# Altium PCB controle_motor_official.PcbDoc
Units mm, origin at the board's own origin, x right, y up, seen from the top; angles counter-clockwise.
Board outline 65.02 x 100.08 mm, 2 copper layers (Top Layer, Bottom Layer); 45 components, 40 nets, 148 pads, 16 vias.
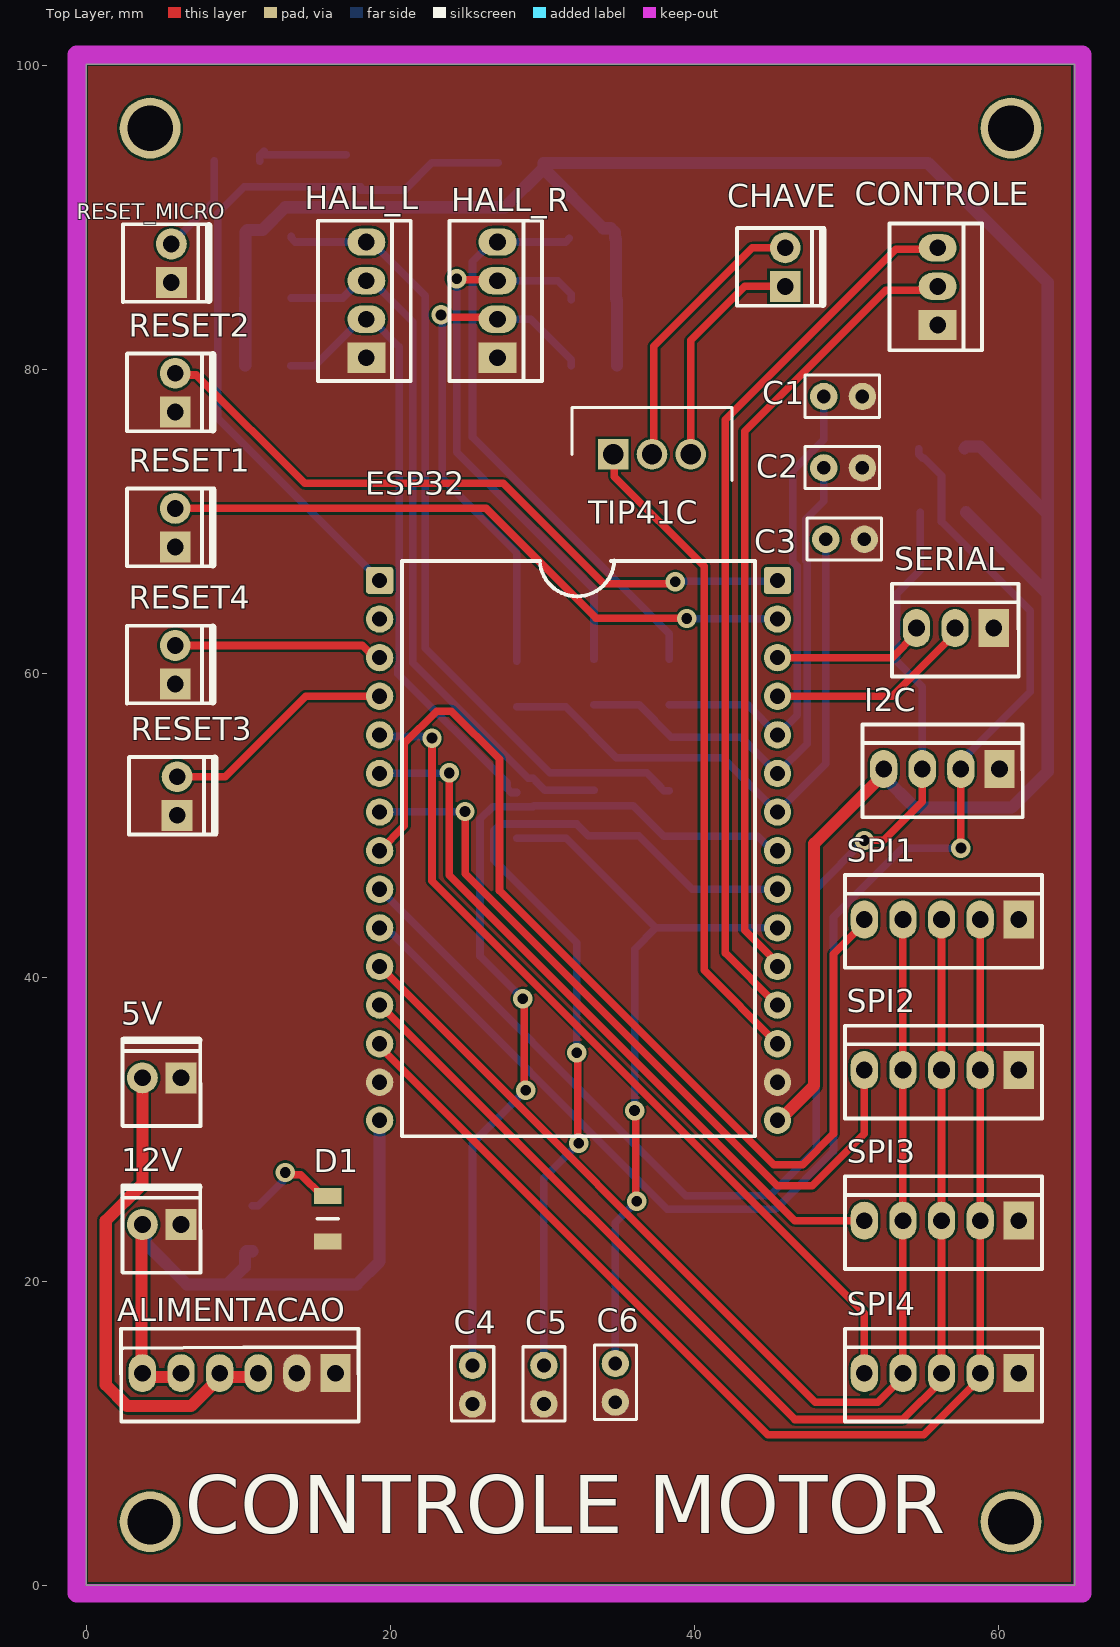
[diagram p0: Top Layer view]
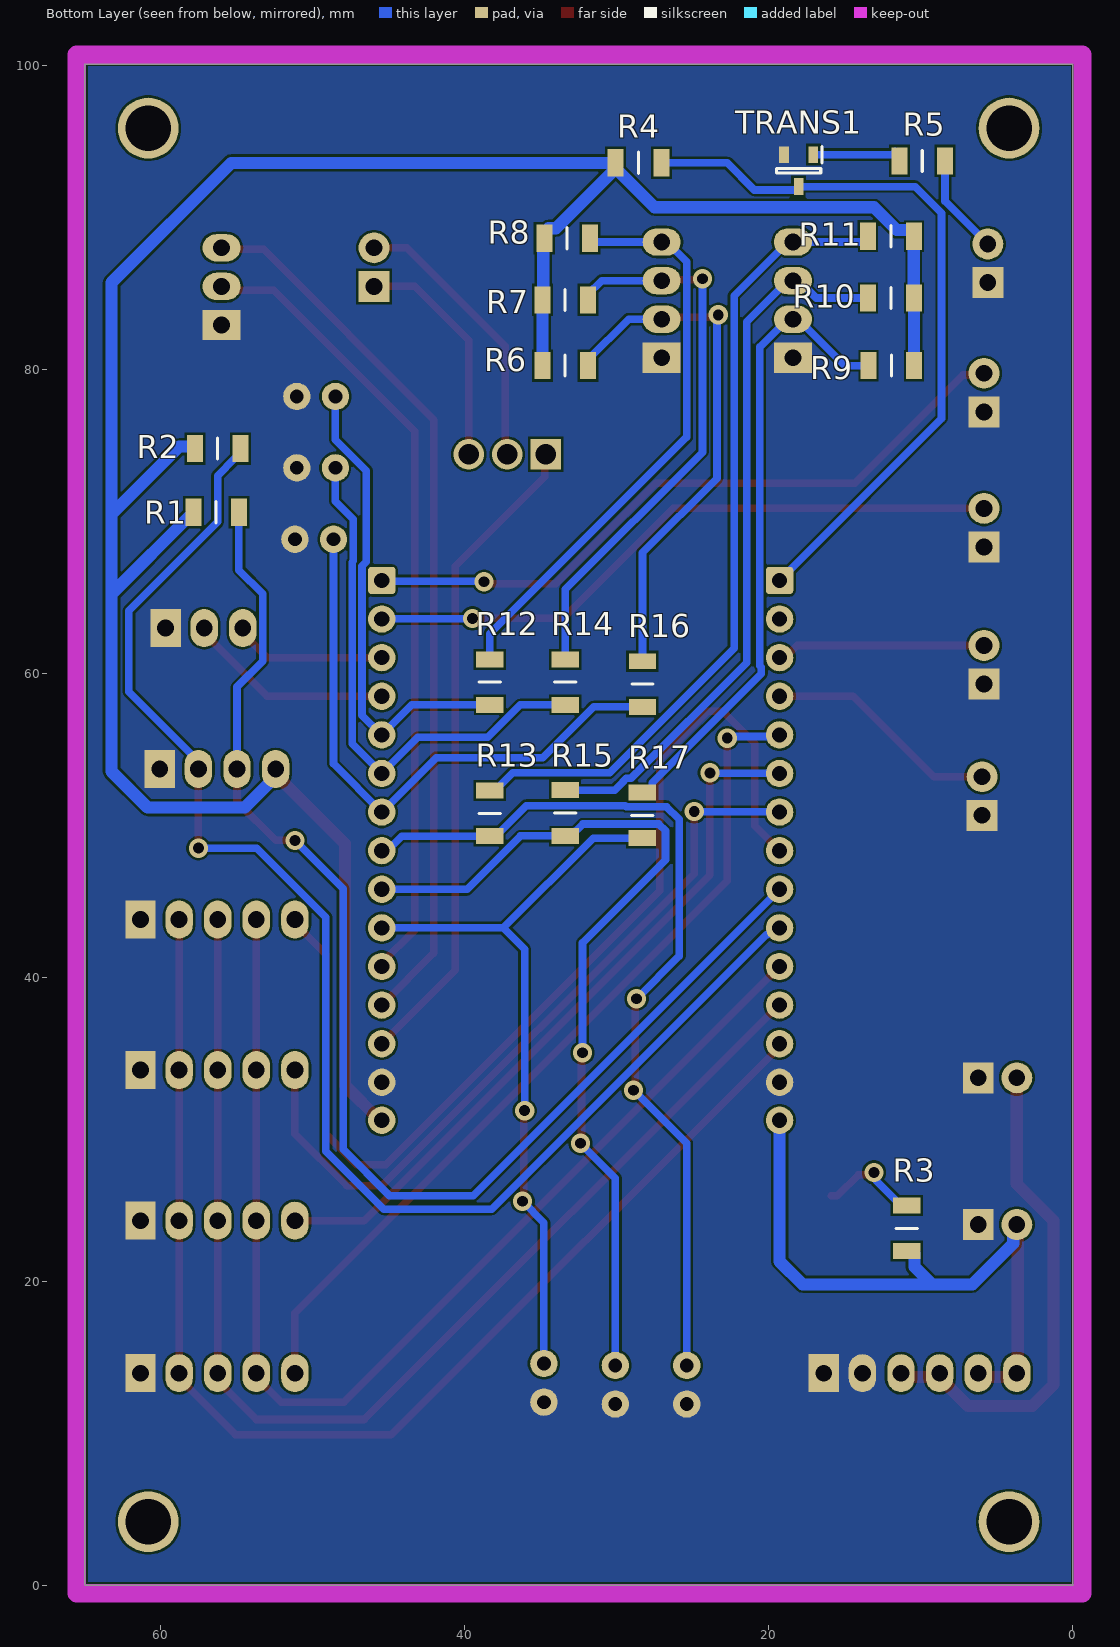
[diagram p1: Bottom Layer view, seen from below]

## Layer stack, top to bottom
Top Solder: solder mask 0.0102, Solder Resist, Dk 3.5
Top Layer: signal copper 0.0356
Dielectric 1: dielectric 0.32, FR-4, Dk 4.8
Bottom Layer: signal copper 0.0356
Bottom Solder: solder mask 0.0102, Solder Resist, Dk 3.5

## Board outline
0,0 65.024,0 65.024,100.076 0,100.076

## Design rules (kind name [scope] priority, off if disabled: settings)
Clearance [All] p1: gap=0.152 ignorepadtopadclearanceinfootprint=FALSE except(0: Arc-Hole Track-Hole SMDPad-Hole THPad-Hole Via-Hole Fill-Hole Poly-Hole Region-Hole Text-Hole)
ComponentClearance [All] p1: gap=0.1 collisioncheckmode=3 verticalgap=0.1 showdistances=FALSE
HoleSize [All] p1: absolutevalues=TRUE maxlimit=3 minlimit=0.025 maxpercent=80.000 minpercent=20.000
MinimumSolderMaskSliver [All] p1: minsoldermaskwidth=0.1
PolygonConnect [All] p1: connectstyle=Direct reliefconductorwidth=0.254 reliefentries=4 polygonreliefangle="90 Angle" airgapwidth=0.254
RoutingVias [All] p1: holewidth=0.4 width=0.8 viastyle="Through Hole" minholewidth=0.3 minwidth=0.6 maxholewidth=0.5 maxwidth=1
SilkToSilkClearance [All] p1: silktosilkclearance=0
SilkToSolderMaskClearance [IsPad] p1: minsilkscreentomaskgap=0 clearancetoexposedcopper=TRUE
SolderMaskExpansion [All] p1: expansion=0.08 istentingtop=FALSE
Width [All] p1: maxlimit=1 minlimit=0.3 preferedwidth=0.5
25 further rules are at their usual default settings.

## Classes and differential pairs
component class U_controle_motor_comunicacao: I2C R1 R2 SERIAL SPI1 SPI2 SPI3 SPI4
component class U_controle_motor_chave: C1 C2 C3 C4 C5 C6 CHAVE CONTROLE HALL_L HALL_R R6 R7 R8 R9 R10 R11 R12 R13 R14 R15 R16 R17 TIP41C
component class U_controle_motor_alimentacao: 5V 12V ALIMENTACAO D1 R3 R4 R5 RESET_MICRO TRANS1
component class controle_motor_official: ESP32 RESET1 RESET2 RESET3 RESET4

## Components (designator, comment, footprint, x,y, rotation, side; value= is the part's Value field where it differs from the comment)
5V "KK_2.54_2vias" KK_2VIAS_180º 6.223,33.401 r180 top
12V "KK_2.54_2vias" KK_2VIAS_180º 6.223,23.749 r180 top
ALIMENTACAO "KK_2.54_6vias" KK_6vias_180° 16.383,13.97 r180 top
C1 "0.1uF" "CAP CER DISK 0.1uF" 49.784,78.232 r180 top
C2 "0.1uF" "CAP CER DISK 0.1uF" 49.784,73.533 r180 top
C3 "0.1uF" "CAP CER DISK 0.1uF" 49.911,68.834 r180 top
C4 "0.1uF" "CAP CER DISK 0.1uF" 25.4,13.208 r90 top
C5 "0.1uF" "CAP CER DISK 0.1uF" 30.099,13.208 r90 top
C6 "0.1uF" "CAP CER DISK 0.1uF" 34.798,13.335 r90 top
CHAVE "KK_2.54_2vias" KK_2VIAS_180º 45.974,85.471 r90 top
CONTROLE "KK_2.54_3vias" KK_3vias_180º 56.007,82.931 r90 top
D1 "LED 3MM RED" "LED RED" 15.875,24.13 r270 top
ESP32 "microcontrolador" ESP32_Desvikit_v1 19.291,66.127 r0 top value="ESP32 Desvikit V1"
HALL_L "KK_2.54_4vias" KK_4vias_180° 18.415,80.772 r90 top
HALL_R "KK_2.54_4vias" KK_4vias_180° 27.051,80.772 r90 top
I2C "KK_2.54_4vias" KK_4vias_180° 60.071,53.721 r180 top
R1 "4k7" RESC3216X60N 56.364,70.612 r0 bottom
R2 "4k7" RESC3216X60N 56.261,74.803 r0 bottom
R3 "680R" RESC3216X60N 10.922,23.495 r90 bottom
R4 "2k2" RESC3216X60N 28.575,93.599 r0 bottom
R5 "2k2" RESC3216X60N 9.906,93.726 r180 bottom
R6 "2k2" RESC3216X60N 33.401,80.264 r0 bottom
R7 "2k2" RESC3216X60N 33.401,84.582 r0 bottom
R8 "2k2" RESC3216X60N 33.274,88.646 r0 bottom
R9 "2k2" RESC3216X60N 11.938,80.264 r180 bottom
R10 "2k2" RESC3216X60N 11.962,84.709 r180 bottom
R11 "2k2" RESC3216X60N 11.962,88.773 r180 bottom
R12 "4k7" RESC3216X60N 38.354,59.436 r270 bottom
R13 "4k7" RESC3216X60N 38.354,50.8 r270 bottom
R14 "4k7" RESC3216X60N 33.394,59.436 r270 bottom
R15 "4k7" RESC3216X60N 33.401,50.824 r270 bottom
R16 "4k7" RESC3216X60N 28.314,59.309 r270 bottom
R17 "4k7" RESC3216X60N 28.321,50.673 r270 bottom
RESET1 "KK_2.54_2vias" KK_2VIAS_180º 5.842,68.326 r90 top
RESET2 "KK_2.54_2vias" KK_2VIAS_180º 5.842,77.216 r90 top
RESET3 "KK_2.54_2vias" KK_2VIAS_180º 5.969,50.673 r90 top
RESET4 "KK_2.54_2vias" KK_2VIAS_180º 5.842,59.309 r90 top
RESET_MICRO "KK_2.54_2vias" KK_2VIAS_180º 5.588,85.725 r90 top
SERIAL "KK_2.54_3vias" KK_3vias_180º 59.69,62.992 r180 top
SPI1 "KK_2.54_5vias" KK_5vias_180° 61.341,43.815 r180 top
SPI2 "KK_2.54_5vias" KK_5vias_180° 61.341,33.909 r180 top
SPI3 "KK_2.54_5vias" KK_5vias_180° 61.341,24.003 r180 top
SPI4 "KK_2.54_5vias" KK_5vias_180° 61.341,13.97 r180 top
TIP41C "TIP41CG" TO254P483X1010X2035-3P 34.671,74.422 r0 top
TRANS1 "Trans BC817" SOT96P240X110-3N 18.034,93.091 r270 bottom

## Footprints (in the part's own frame and the unit in brackets; to place one, negate y for a bottom-side part, rotate by r counter-clockwise, add the part's x,y. Pads: shape width x height; smd on the part's side, far side on the other; paste and mask are expansions set on the pad)
"CAP CER DISK 0.1uF" [mm] "Connector; Header; 5 Position"
  round 1.8 hole 0.9: 1(-1.27,0) 2(1.27,0)
  silkscreen extent -2.4,-1.4 2.5,1.37, body extent -2.28,-1.25 2.42,1.25, height 6.1
ESP32_Desvikit_v1 [mm]
  rrect25% 1.8x1.8 hole 1: 1(0,0) 30(26.175,0)
  round 1.8 hole 1: 2(0,-2.54) 3(0,-5.08) 4(0,-7.62) 5(0,-10.16) 6(0,-12.7) 7(0,-15.24) 8(0,-17.78) 9(0,-20.32) 10(0,-22.86) 11(0,-25.4) 12(0,-27.94) 13(0,-30.48) 14(0,-33.02) 15(0,-35.52) 16(26.175,-35.52) 17(26.175,-33.02) 18(26.175,-30.48) 19(26.175,-27.94) 20(26.175,-25.4) 21(26.175,-22.86) 22(26.175,-20.32) 23(26.175,-17.78) 24(26.175,-15.24) 25(26.175,-12.7) 26(26.175,-10.16) 27(26.175,-7.62) 28(26.175,-5.08) 29(26.175,-2.54)
  silkscreen extent 1.47,-36.57 24.69,1.31, body extent -1.2,-46.03 27.4,4.9, height 15.1
KK_2VIAS_180º [mil]
  rect 80x80 hole 43.31: 1(0,0)
  round 80 hole 43.31: 2(100,0)
  silkscreen extent -50,-101 151,125, body extent -61,-108 165,128, height 464
KK_3vias_180º [mm]
  rect 2x2.5 hole 1.1: 1(0,0)
  oval 1.8x2.5 hole 1.1: 2(2.54,0) 3(5.08,0)
  silkscreen extent -1.65,-2.92 6.69,3.18, body extent -1.6,-2.95 6.69,3.05, height 11.9
KK_4vias_180° [mm]
  rect 2x2.5 hole 1.1: 1(0,0)
  oval 1.8x2.5 hole 1.1: 2(2.54,0) 3(5.08,0) 4(7.62,0)
  silkscreen extent -1.53,-2.92 9.02,3.18, body extent -1.4,-2.79 8.76,3.01, height 11.72
KK_5vias_180° [mm]
  rect 2x2.5 hole 1.1: 1(0,0)
  oval 1.8x2.5 hole 1.1: 2(2.54,0) 3(5.08,0) 4(7.62,0) 5(10.16,0)
  silkscreen extent -1.53,-2.92 11.43,3.18, body extent -1.4,-2.79 11.3,3.01, height 11.72
KK_6vias_180° [mm]
  rect 2x2.5 hole 1.1: 1(0,0)
  oval 1.8x2.5 hole 1.1: 2(2.54,0) 3(5.08,0) 4(7.62,0) 5(10.16,0) 6(12.7,0)
  silkscreen extent -1.53,-2.92 14.11,3.18, body extent -1.4,-2.79 13.84,3.05, height 11.7
"LED RED" [mm]
  rect 1.05x1.8 smd: 1(-1.5,0) 2(1.5,0)
  silkscreen extent 0,-0.7 0,0.7, body extent -0.79,-0.43 0.81,0.37, height 0.75
RESC3216X60N [mm]
  rect 1.05x1.8 smd: 1(-1.5,0) 2(1.5,0)
  silkscreen extent 0,-0.7 0,0.7, body extent -1.57,-0.8 1.58,0.8, height 0.6
SOT96P240X110-3N [mm]
  rect 1.1x0.65 smd: 1(-1.05,0.96) 2(-1.05,-0.96) 3(1.05,0)
  silkscreen extent -1.6,-1.45 0.15,1.54, body extent -1.2,-1.45 1.2,1.45, height 1.1
TO254P483X1010X2035-3P [mm]
  rect 2.01x2.01 hole 1.34: 1(0,0)
  round 2.01 hole 1.34: 2(2.54,0) 3(5.08,0)
  silkscreen extent -2.73,-1.74 7.81,3.1, body extent -2.51,-1.74 7.59,3.1, height 18.56

## Part data
5V 12V CHAVE RESET1 RESET2 RESET3 RESET4 RESET_MICRO: "Conector KK 2.54mm 2 vias", Descrição="Conector KK 3 vias com passo 2.54mm", Encapsulamento="PTH - 180º", Modelo="2 vias - 180º", Valor="KK 2 vias 180º"
ALIMENTACAO: "Conector KK 2.54mm 6 vias", Descrição="Conector KK 3 vias com passo 2.54mm", Encapsulamento="PTH - 180º", Modelo="3 vias - 180º", Valor="KK 6 vias 180º"
C1 C2 C3 C4 C5 C6: library part "CAP CER DISK 0.1uF", "CAP CER DISK 0.1uF", Capacitance Tolerance="+80%, -20%", Capacitor Terminals="Radial Leaded", Dielectric Characteristic=Y5, Manufacturer=-, Manufacturer Part Number=IMP14925, Operating Temperature Max=85, Operating Temperature Min=-25, Operating Temperature Range="-25°C to +85°C<!--FANDB--><div class=\"features-and-benefits-container\"><div class=\"features-and-benefits-description\"><span class=\"features-benefits-value\">The MCFY series from Multicomp are radial leaded ceramic disc capacitors. The capacitance values ranges from 6800pF to 0.22?F.</span></div><div class=\"features-and-benefits-list\"><ul class=\"features-and-benefits-list-list\"><li class=\"features-and-benefits-list-item\">Large capacitance in small size</li><li class=\"features-and-benefits-list-item\">Rated voltage of 50V</li><li class=\"features-and-benefits-list-item\">80%/-20% tolerance</li><li class=\"features-and-benefits-list-item\">Operating temperature range -25°C to +85", Supplier Part Number 1="Capacitor Cerâmico Disco 100Kpf/50V (104/100K/100nF/0.1uF) cód. 1351", Voltage Rating=50, Capacitance=0.1uF, Capacitance Tolerance ±="+80%, -20%", ComponentLink1Description=http://loja.multcomercial.com.br/capacitor-ceramico-disco-100kpf-50v-104-100k-100nf-0-1uf-cod-1351.html, ComponentLink1URL=http://loja.multcomercial.com.br/capacitor-ceramico-disco-100kpf-50v-104-100k-100nf-0-1uf-cod-1351.html, Lead Spacing=5, Packaging=Each, Pricing 1="1=0.10 (BRL)", Product Range="MCFY Series", RoHS=YES, Stock 1=115809, Supplier 1="Mult Comercial", SVHC="No SVHC (15-Jun-2015)"
CONTROLE SERIAL: "Conector KK 2.54mm 3 vias", Descrição="Conector KK 3 vias com passo 2.54mm", Encapsulamento="PTH - 180º", Modelo="3 vias - 180º", Valor="KK 3 vias 180º"
D1: Current If Luminous Intensity=2, Forward Current If=20, Forward Voltage VF Max=2.5, LED Colour=Red, Manufacturer=Paralight, Manufacturer Part Number=IMP585, Operating Temperature Max=85, Operating Temperature Min=-40, Operating Temperature Range="-40°C to +85", Peak Forward Current=7, Supplier Part Number 1="Led 3mm Vermelho Difuso L-314HD - Paralight", Voltage Vf Typ="2.2V<!--FANDB--><div class=\"features-and-benefits-container\"><div class=\"features-and-benefits-description\"><span class=\"features-benefits-value\">The L-934LID from Kingbright is a through hole round shape high efficiency red colour LED. The device is made of gallium arsenide phosphide on gallium phosphide orange light emitting diode. This LED is widely used because of low power consumption, long life and solid state reliability.</span></div><div class=\"features-and-benefits-list\"><ul class=\"features-and-benefits-list-list\"><li class=\"features-and-benefits-list-item\">Standard bulb size of T-1 (3mm)</li><li class=\"features-and-benefits-list-item\">Reliable and rugged</li><li class=\"features-and-benefits-list-item\">Viewing angle is 60°</li><li class=\"features-and-benefits-list-item\">Luminous intensity of 3mcd at 2mA</li><li class=\"features-and-benefits-list-item\">Forward voltage is 2.0V</li><li class=\"features-and-benefits-list-item\">Forward current (If) is 20mA</li><li class=\"features-and-benefits-list-item\">Dominant wavelength is 625nm at IF=20mA</li><li class=\"features-and-benefits-list-item\">Peak wavelength is 627nm at IF=20", Bulb Size=3mm, ComponentLink1Description=http://loja.multcomercial.com.br/led-3mm-vermelho-difuso-l-314hd-paralight.html, ComponentLink1URL=http://loja.multcomercial.com.br/led-3mm-vermelho-difuso-l-314hd-paralight.html, Dominant Wavelength=625, External Diameter=2.9, External Length / Height=4.6, Forward Current If Max=20, Forward Voltage=2, Lead Cross-section Depth=0.5, Lead Cross-section Width=0.5, Lead Spacing=2.54, LED / Lamp Size="3mm / T-1", LED Mounting="Through Hole", LED Type=Standard, Lens Shape=Round, Luminous Intensity=3, Luminous Intensity @ If Min=0.7, Luminous Intensity Typ=3, Mounting Type="PCB Through Hole", MSL=-, No. of Pins=2, Packaging=Each, Peak Wavelength=625, PIV Max=5, Pricing 1="1=0.15 (BRL)", RoHS=YES, Stock 1=35260, Supplier 1="Mult Comercial", SVHC="No SVHC (15-Jun-2015)", Viewing Angle=60°, Wavelength Typ=625
ESP32: library part "ESP32 Desvikit v1", "microcontrolador com moculo bluethoth e wifi"
HALL_L HALL_R I2C: "Conector KK 2.54mm 4 vias", Descrição="Conector KK 3 vias com passo 2.54mm", Encapsulamento="PTH - 180º", Modelo="3 vias - 180º", Valor="KK 4 vias 180º"
R1 R2 R12 R13 R14 R15 R16 R17: library part "RES 1206", "RES 1206 5%", Arrow Part Number=CRCW12064K70FKEA, Manufacturer_Name=Vishay, Mouser Part Number=71-CRCW1206-4.7K-E3, Arrow Price/Stock=https://www.arrow.com/en/products/crcw12064k70fkea/vishay, Datasheet Link=http://docs-emea.rs-online.com/webdocs/13ec/0900766b813ecc08.pdf, Height=0.6mm, Manufacturer_Part_Number=CRCW12064K70FKEA, Mouser Price/Stock=https://www.mouser.co.uk/ProductDetail/Vishay-Dale/CRCW12064K70FKEA?qs=1vm4qhDHCvlKJmatsKzyFQ%3D%3D
R3 R4 R5 R6 R7 R8 R9 R10 R11: library part "Resistor 1206", "Resistor", Arrow Part Number=CRCW12064K70FKEA, Manufacturer_Name=Vishay, Mouser Part Number=71-CRCW1206-4.7K-E3, Arrow Price/Stock=https://www.arrow.com/en/products/crcw12064k70fkea/vishay, Datasheet Link=http://docs-emea.rs-online.com/webdocs/13ec/0900766b813ecc08.pdf, Height=0.6mm, Manufacturer_Part_Number=CRCW12064K70FKEA, Mouser Price/Stock=https://www.mouser.co.uk/ProductDetail/Vishay-Dale/CRCW12064K70FKEA?qs=1vm4qhDHCvlKJmatsKzyFQ%3D%3D
SPI1 SPI2 SPI3 SPI4: "Conector KK 2.54mm 5 vias", Descrição="Conector KK 3 vias com passo 2.54mm", Encapsulamento="PTH - 180º", Modelo="3 vias - 180º", Valor="KK 5 vias 180º"
TIP41C: "Transistor", Manufacturer_Name="ON Semiconductor", Mouser Part Number=863-TIP41CG, Arrow Part Number=TIP41CG, Arrow Price/Stock=https://www.arrow.com/en/products/tip41cg/on-semiconductor, Datasheet Link=http://www.onsemi.com/pub/Collateral/TIP41A-D.PDF, Height=4.83mm, Manufacturer_Part_Number=TIP41CG, Mouser Price/Stock=https://www.mouser.co.uk/ProductDetail/onsemi/TIP41CG?qs=xZq1yRCsb1dnnb4X32QAFQ%3D%3D
TRANS1: "Transistor BJT NPN BC817-25-7-F", Arrow Part Number=BC817-25-7-F, Manufacturer_Name="Diodes Inc.", Mouser Part Number=621-BC817-25-7-F, Arrow Price/Stock=https://www.arrow.com/en/products/bc817-25-7-f/diodes-incorporated, Datasheet Link=https://www.diodes.com/assets/Datasheets/ds11107.pdf, Height=1.1mm, Manufacturer_Part_Number=BC817-25-7-F, Mouser Price/Stock=https://www.mouser.co.uk/ProductDetail/Diodes-Incorporated/BC817-25-7-F?qs=rGAXPo9uwV0jK0EyLZnqOw%3D%3D

## Free pads (board coordinates)
  round 4 hole 3: 1(4.191,4.191) 2(60.833,4.191) 3(60.833,95.885) 4(4.191,95.885)

## Via types
v1: diameter 1.27, hole 0.711, Top Layer to Bottom Layer, 16 vias

## Nets (pads, with @x,y where several pads share a name; then routed paths per layer and width w, separated by ;. In a path a pad name is that pad's centre, name@x,y a point inside that pad or via, vN(x,y) a via of type N, cw(c..) or ccw(c..) an arc to the next point about the centre after c; other vN are vias at no path point)
+3V3: ESP32.16 I2C.4 R1.2 R2.2 R4.2 R6.2 R7.2 R8.2 R9.2 R10.2 R11.2 | length 168.6
  Top Layer w0.8: ESP32.16 45.593,30.607 47.879,32.893 47.879,48.799 52.451,53.371 I2C.4
  Bottom Layer w0.8: R9.2 10.45,80.276 10.45,84.697 R10.2 10.462,89.052 10.587,89.177 11.58,89.177 13.081,90.678 27.529,90.678 R4.2@30.075,93.224 ; R6.2 R7.2 34.837,84.645 34.837,88.582 R8.2 34.774,89.021 34.499,89.296 34.003,89.296 R4.2@30.075,93.224 ; I2C.4 52.451,53.213 54.483,51.181 60.872,51.181 63.246,53.555 63.246,65.23 ; R2.2 57.761,74.805 57.886,74.93 58.801,74.93 63.246,70.485 ; R1.2 63.246,65.23 ; R4.2@30.075,93.224 R4.2 55.372,93.599 63.246,85.725 63.246,70.485 ; 63.246,65.23 63.246,70.485
+5V: 5V.2 ALIMENTACAO.3 ALIMENTACAO.4 | length 32.9
  Top Layer w0.8: 5V.2 3.683,26.416 1.27,24.003 1.27,13.208 2.667,11.811 6.888,11.811 8.403,13.326 ALIMENTACAO.4@8.403,14.203 ; ALIMENTACAO.4@9.017,13.716 ALIMENTACAO.3@11.557,13.716
+12V: 12V.2 ALIMENTACAO.5 ALIMENTACAO.6 ESP32.15 R3.1 | length 43.2
  Top Layer w0.8: ALIMENTACAO.6@3.619,14.034 3.619,23.685 12V.2 ; ALIMENTACAO.6@4,13.779 3.937,13.716 ALIMENTACAO.5@6.477,13.716
  Bottom Layer w0.8: 12V.2 3.919,23.513 3.919,22.497 6.604,19.812 9.271,19.812 ; R3.1 10.547,21.995 10.422,21.87 10.422,20.963 9.271,19.812 ; ESP32.15 19.291,21.323 17.78,19.812 9.271,19.812
acelerador: CONTROLE.3 ESP32.19 | length 58.6
  Top Layer w0.5: ESP32.19 42.037,41.616 42.037,76.708 53.245,87.916 55.912,87.916 CONTROLE.3
chave: ESP32.18 TIP41C.1 | length 43.2
  Top Layer w0.5: TIP41C.1 34.736,74.357 34.736,72.96 40.64,67.056 40.64,40.473 ESP32.18
CLK_IN: ESP32.11 SPI1.4 SPI2.4 SPI3.4 SPI4.4 | length 77.1
  Top Layer w0.5: ESP32.11 47.953,12.065 52.07,12.065 53.721,13.716 SPI3.4 SPI2.4 SPI1.4
EN: ESP32.1 R4.1 TRANS1.3 | length 48.5
  Bottom Layer w0.5: TRANS1.3@18.034,91.816 20.95,91.816 22.733,93.599 R4.1 ; TRANS1.3 10.38,92.041 8.636,90.297 8.636,76.782 ESP32.1
GND: 5V.1 12V.1 ALIMENTACAO.1 ALIMENTACAO.2 C1.1 C2.1 C3.1 C4.1 C5.1 C6.1 CONTROLE.1 D1.2 ESP32.14 ESP32.17 HALL_L.1 HALL_R.1 I2C.1 RESET1.1 RESET2.1 RESET3.1 RESET4.1 RESET_MICRO.1 SERIAL.1 SPI1.1 SPI2.1 SPI3.1 SPI4.1 TRANS1.2
ha_l: C6.2 ESP32.21 R17.2 | length 49.5
  Top Layer w0.5: v1(36.068,31.242) 36.136,31.174 36.136,25.349 v1(36.203,25.281)
  Bottom Layer w0.5: R17.2 31.558,49.173 37.464,43.267 ; C6.2 34.798,23.876 v1(36.203,25.281) ; v1(36.068,31.242) 36.068,41.871 37.464,43.267 ; ESP32.21 37.464,43.267
ha_r: C3.2 ESP32.24 R16.2 | length 39.3
  Bottom Layer w0.5: R16.2 31.527,57.809 34.864,54.472 41.881,54.472 ESP32.24 48.641,54.062 C3.2
hb_l: C5.2 ESP32.22 R15.2 | length 59.1
  Top Layer w0.5: v1(32.258,35.052) 32.326,34.984 32.326,29.159 v1(32.393,29.091)
  Bottom Layer w0.5: C5.2 30.099,26.797 v1(32.393,29.091) ; v1(32.258,35.052) 32.258,42.284 26.797,47.745 26.797,49.657 27.24,50.1 32.25,50.1 33.026,49.324 R15.2 36.336,49.324 39.853,45.807 ESP32.22
hb_r: C2.2 ESP32.25 R14.2 | length 35.4
  Bottom Layer w0.5: R14.2 36.36,57.936 38.491,55.806 43.087,55.806 ESP32.25 47.42,55.381 47.42,67.332 47.339,67.413 47.339,70.15 48.514,71.325 C2.2
hc_l: C4.2 ESP32.23 R13.2 | length 59.8
  Top Layer w0.5: v1(28.702,38.608) 28.801,38.509 28.801,32.683 v1(28.901,32.584)
  Bottom Layer w0.5: C4.2 25.4,29.083 v1(28.901,32.584) ; v1(28.702,38.608) 25.891,41.419 25.891,50.402 26.735,51.246 29.388,51.246 29.45,51.308 35.971,51.308 37.979,49.3 R13.2 44.161,49.3 45.114,48.347 ESP32.23
hc_r: C1.2 ESP32.26 R12.2 | length 31.7
  Bottom Layer w0.5: R12.2 43.497,57.936 ESP32.26 46.768,57.269 46.768,67.062 46.482,67.348 46.482,73.342 48.514,75.374 C1.2
MISO_IN: ESP32.12 SPI1.3 SPI2.3 SPI3.3 SPI4.3 | length 79.7
  Top Layer w0.5: ESP32.12 19.344,38.187 46.609,10.922 53.721,10.922 56.261,13.462 SPI3.3 SPI2.3 SPI1.3
MOSI_IN: ESP32.13 SPI1.2 SPI2.2 SPI3.2 SPI4.2 | length 82
  Top Layer w0.5: ESP32.13 19.291,35.446 44.831,9.906 55.087,9.906 58.801,13.62 SPI4.2 SPI3.2 SPI2.2 SPI1.2
NetCHAVE_1: CHAVE.1 TIP41C.3 | length 15.2
  Top Layer w0.5: TIP41C.3 39.751,81.915 43.307,85.471 CHAVE.1
NetCHAVE_2: CHAVE.2 TIP41C.2 | length 18.5
  Top Layer w0.5: TIP41C.2 37.338,74.549 37.338,81.534 43.815,88.011 CHAVE.2
NetD1_1: D1.1 R3.2 | length 6.7
  Top Layer w0.5: v1(13.081,27.178) 13.228,27.031 14.099,27.031 15.5,25.63 D1.1
  Bottom Layer w0.5: R3.2 11.297,24.995 12.934,26.632 12.934,27.031 v1(13.081,27.178)
NetHALL_L_2: HALL_L.2 R9.1 R17.1 | length 42
  Bottom Layer w0.5: R9.1 15.017,80.264 18.065,83.312 18.765,83.312 20.593,81.484 20.593,60.508 20.497,60.411 20.497,59.997 27.671,52.823 27.671,52.448 27.946,52.173 R17.1
NetHALL_L_3: HALL_L.3 R10.1 R15.1 | length 47.5
  Bottom Layer w0.5: R10.1 16.875,84.709 18.018,85.852 18.765,85.852 21.463,83.154 21.463,60.706 29.069,53.1 29.388,53.1 29.623,52.865 29.623,52.851 30.15,52.324 R15.1
NetHALL_L_4: HALL_L.4 R11.1 R13.1 | length 53.7
  Bottom Layer w0.5: R11.1 13.462,88.667 13.737,88.392 HALL_L.4 18.765,88.392 22.288,84.869 22.288,61.659 30.48,53.467 36.85,53.467 37.704,52.613 37.704,52.575 37.979,52.3 R13.1
NetHALL_R_2: HALL_R.2 R6.1 R16.1 | length 35
  Top Layer w0.5: v1(23.325,83.599) 23.468,83.455 26.908,83.455 HALL_R.2
  Bottom Layer w0.5: v1(23.325,83.599) 23.407,83.517 23.407,72.859 28.314,67.952 R16.1 ; HALL_R.2 29.228,83.312 31.901,80.639 R6.1
NetHALL_R_3: HALL_R.3 R7.1 R14.1 | length 37.1
  Top Layer w0.5: v1(24.362,85.979) 24.425,85.915 26.987,85.915 HALL_R.3
  Bottom Layer w0.5: v1(24.362,85.979) 24.362,74.571 33.394,65.539 R14.1 ; HALL_R.3 31.006,85.852 31.901,84.957 R7.1
NetHALL_R_4: HALL_R.4 R8.1 R12.1 | length 38.5
  Bottom Layer w0.5: R8.1 31.52,88.392 26.701,88.392 25.399,87.09 25.399,75.566 38.354,62.611 R12.1
NetR5_1: R5.1 TRANS1.1 | length 6.3
  Bottom Layer w0.5: R5.1 11.406,94.101 R5.1@11.681,94.376 ; R5.1@11.543,94.141 TRANS1.1
NetR5_2: R5.2 RESET_MICRO.2 | length 6.6
  Bottom Layer w0.5: RESET_MICRO.2 8.406,91.083 R5.2
reset_interface: ESP32.4 RESET3.2 | length 15.5
  Top Layer w0.5: RESET3.2 9.144,53.213 14.438,58.507 ESP32.4
reset_percepcao_ext: ESP32.30 RESET2.2 | length 45.4
  Top Layer w0.5: RESET2.2 5.956,79.642 7.226,79.642 14.351,72.517 27.432,72.517 32.502,67.447 34.036,65.913 38.608,65.913 v1(38.735,66.04)
  Bottom Layer w0.5: v1(38.735,66.04) 38.779,66.084 45.422,66.084 ESP32.30
reset_sinalizacao: ESP32.29 RESET1.2 | length 42.6
  Top Layer w0.5: RESET1.2 26.289,70.866 33.528,63.627 v1(39.497,63.627)
  Bottom Layer w0.5: v1(39.497,63.627) 39.517,63.607 45.446,63.607 ESP32.29
reset_telemetria: ESP32.3 RESET4.2 | length 13.8
  Top Layer w0.5: RESET4.2 18.137,61.849 18.939,61.047 ESP32.3
rx: ESP32.27 SERIAL.2 | length 13.7
  Top Layer w0.5: ESP32.27 53.015,58.507 57.15,62.642 SERIAL.2
SCL_IN: ESP32.10 I2C.2 R2.1 | length 96
  Top Layer w0.5: v1(57.531,48.514) I2C.2
  Bottom Layer w0.5: ESP32.10 19.643,43.267 20.093,42.817 20.175,42.817 38.227,24.765 45.339,24.765 49.149,28.575 49.149,43.974 53.689,48.514 v1(57.531,48.514) ; R2.1 54.761,74.428 55.036,74.153 55.133,74.153 56.261,73.025 56.261,69.977 62.103,64.135 62.103,58.801 57.531,54.229 I2C.2
SDA_IN: ESP32.9 I2C.3 R1.1 | length 85.2
  Top Layer w0.5: v1(51.181,49.022) 52.451,49.022 54.991,51.562 I2C.3
  Bottom Layer w0.5: ESP32.9 39.444,25.654 44.958,25.654 48.006,28.702 48.006,45.847 v1(51.181,49.022) ; R1.1 54.864,66.81 53.308,65.254 53.308,60.804 54.991,59.121 I2C.3
SS_interface: ESP32.5 SPI4.5 | length 57.1
  Top Layer w0.5: v1(22.733,55.753) 22.733,46.355 51.181,17.907 SPI4.5
  Bottom Layer w0.5: ESP32.5 19.398,55.86 22.626,55.86 v1(22.733,55.753)
SS_percepcao_ext: ESP32.6 SPI3.5 | length 48.3
  Top Layer w0.5: ESP32.6@19.09,53.427 ESP32.6 ; v1(23.876,53.467) 23.876,46.736 46.609,24.003 SPI3.5
  Bottom Layer w0.5: ESP32.6 19.311,53.447 23.856,53.447 v1(23.876,53.467)
SS_sinalizacao: ESP32.8 SPI1.5 | length 70
  Top Layer w0.5: ESP32.8 20.922,49.978 20.922,55.408 23.044,57.531 24.003,57.531 27.178,54.356 27.178,45.72 45.212,27.686 47.117,27.686 49.149,29.718 49.149,41.529 51.181,43.561 SPI1.5
SS_telemetria: ESP32.7 SPI2.5 | length 50.1
  Top Layer w0.5: v1(24.913,50.927) 24.913,46.842 45.466,26.289 47.752,26.289 51.181,29.718 SPI2.5
  Bottom Layer w0.5: ESP32.7 19.311,50.907 24.893,50.907 v1(24.913,50.927)
tx: ESP32.28 SERIAL.3 | length 10.2
  Top Layer w0.5: ESP32.28 53.015,61.047 54.61,62.642 SERIAL.3
volante: CONTROLE.2 ESP32.20 | length 52.8
  Top Layer w0.5: ESP32.20 45.466,40.96 43.307,43.119 43.307,75.946 52.583,85.222 55.758,85.222 CONTROLE.2
pads on no net: ESP32.2

## Polygon pours and split planes (outlines as drawn)
GND on Bottom Layer "GND_L02_P000" (solid, pour order 0): 0,100.076 65.024,100.076 65.024,0 0,0
GND on Top Layer "GND_L01_P001" (solid, pour order 1): 0,100.076 65.024,100.076 65.024,0 0,0

## Keep-outs
Keep-Out Layer:
  lines w1.2: -0.635,-0.508 -0.635,100.711 65.532,100.711 65.532,-0.508 -0.635,-0.508

## Silkscreen, mask and mechanical layers (free items; w line width, h text height)
Top Overlay:
  text "CONTROLE MOTOR" at 6.477,3.429 h3.81

## Text inside footprints (layer, text, board x,y; h text height)
C1: Mechanical 29 "1" at 50.184,79.332 h0.5 r180
C2: Mechanical 29 "1" at 50.184,74.633 h0.5 r180
C3: Mechanical 29 "1" at 50.311,69.934 h0.5 r180
C4: Mechanical 29 "1" at 26.5,12.808 h0.5 r90
C5: Mechanical 29 "1" at 31.199,12.808 h0.5 r90
C6: Mechanical 29 "1" at 35.898,12.935 h0.5 r90